# Altium PCB flyback.PcbDoc
Units mm, origin at the board's own origin, x right, y up, seen from the top; angles counter-clockwise.
Board outline 113.6 x 46 mm, 2 copper layers (Top Layer, Bottom Layer), stack 1.57 mm thick; 41 components, 13 nets, 92 pads, 23 vias.
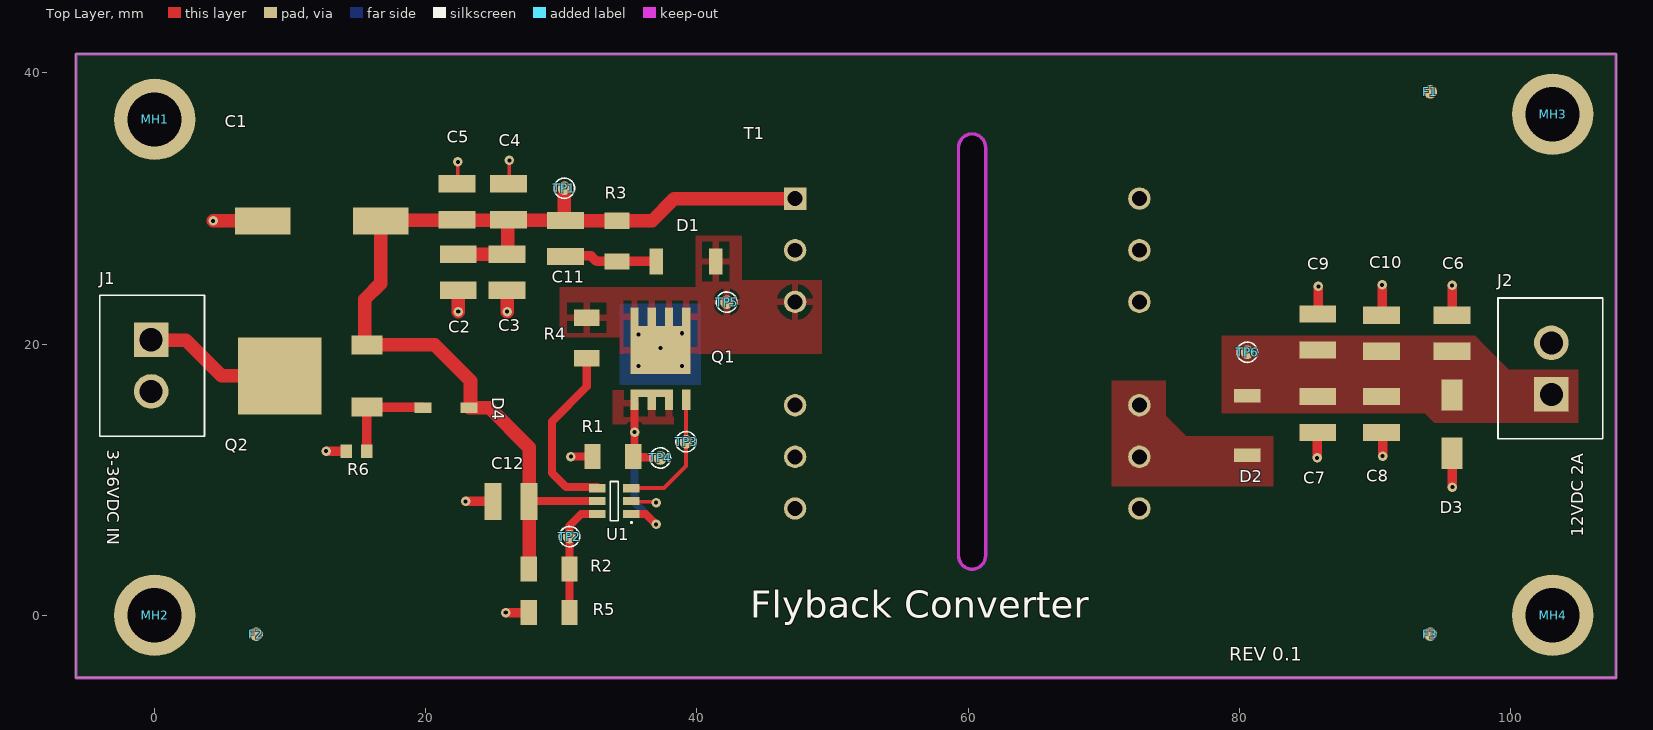
[diagram p0: Top Layer view]
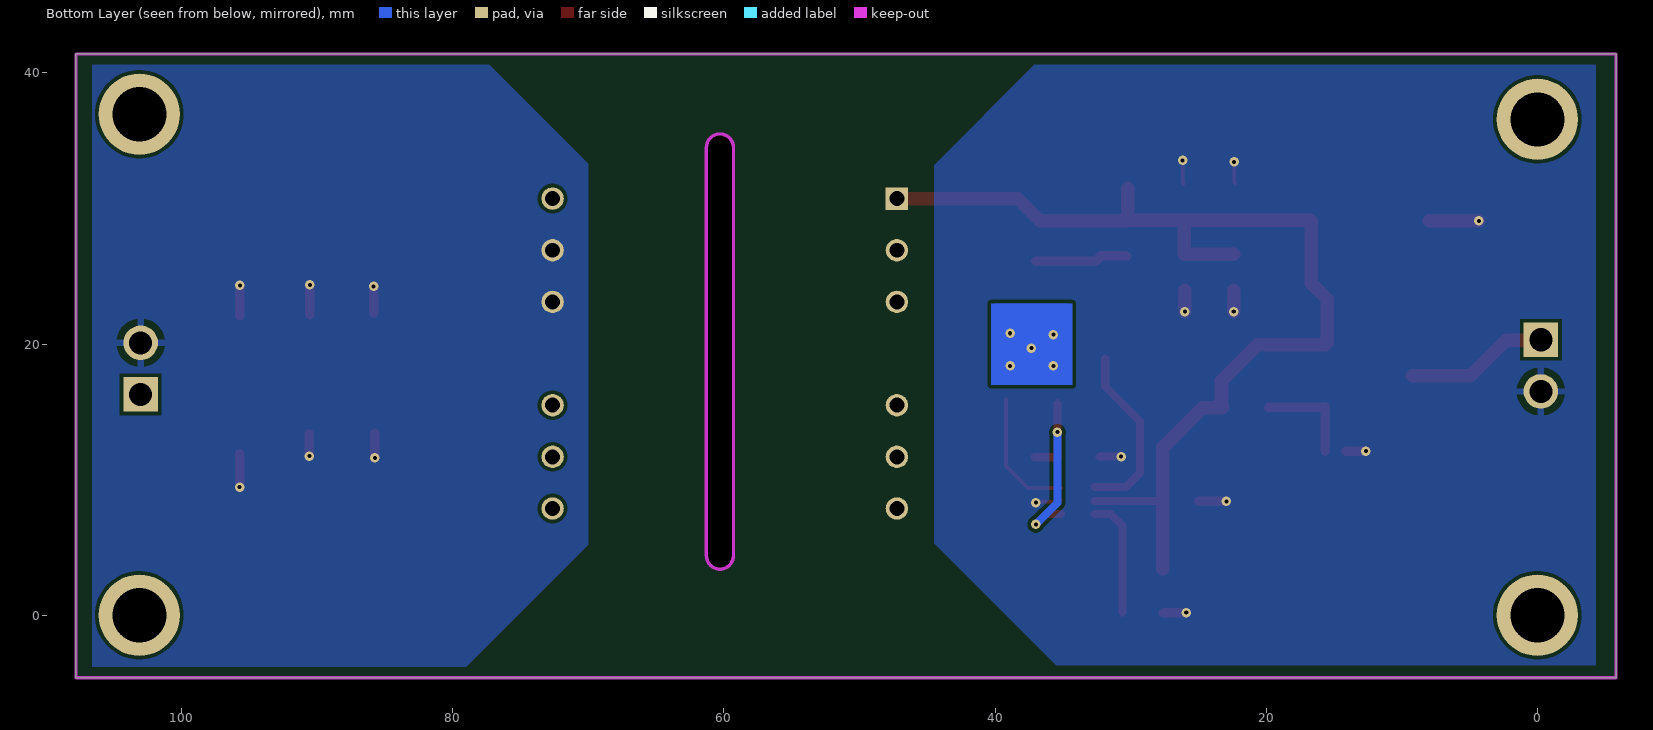
[diagram p1: Bottom Layer view, seen from below]
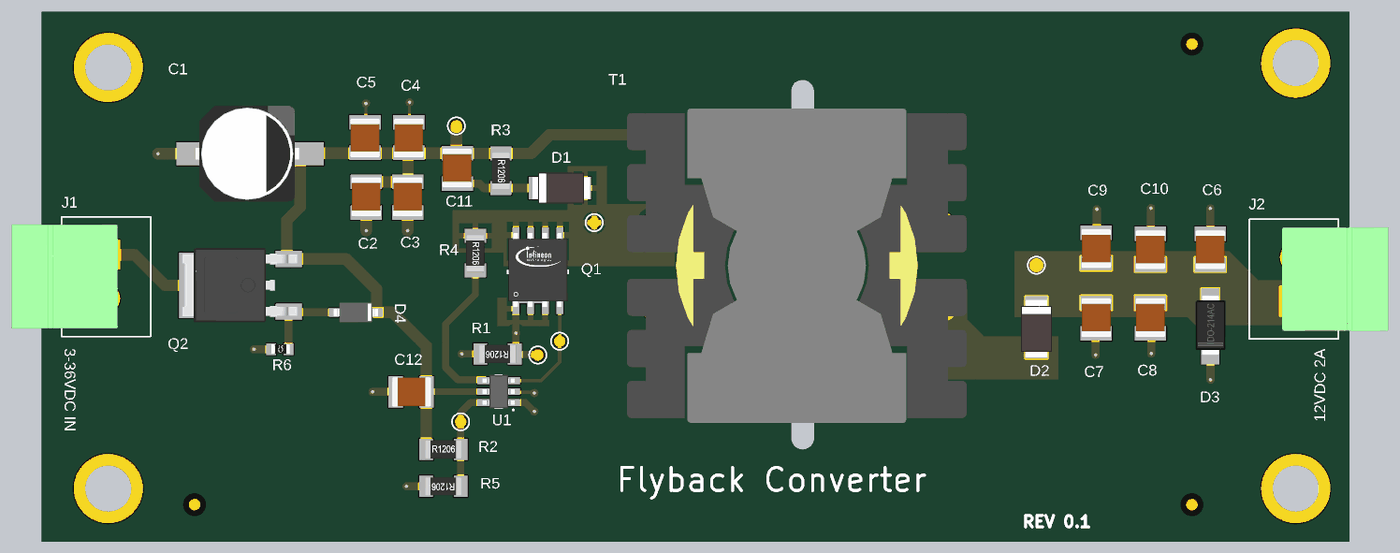
[diagram p2: 3D render of the assembled board from above, using the file's embedded part models]

## Layer stack, top to bottom
Top Solder: solder mask 0.0102, Solder Resist, Dk 3.5
Top Layer: signal copper 0.0356
Dielectric 1: core 1.4986, Core-043, Dk 4.3
Bottom Layer: signal copper 0.0356
Bottom Solder: solder mask 0.0102, Solder Resist, Dk 3.5

## Board outline
-5.8,-4.6 -5.8,41.4 107.8,41.4 107.8,-4.6
cut-out: 59.3,4.4 ccw(c60.3,4.4) 61.3,4.4 61.3,34.5 ccw(c60.3,34.5) 59.3,34.5

## Design rules (kind name [scope] priority, off if disabled: settings)
Clearance [All] p1: gap=0.254 ignorepadtopadclearanceinfootprint=TRUE
HoleSize [All] p1: absolutevalues=TRUE maxlimit=10 minlimit=0.3 maxpercent=80.000 minpercent=20.000
MinimumSolderMaskSliver [All] p1: minsoldermaskwidth=0.127
PolygonConnect PolygonConnect_D2_1 [InNet('NetD2_1')] p1: connectstyle=Direct reliefconductorwidth=0.5 reliefentries=4 polygonreliefangle="90 Angle" airgapwidth=0.5
PolygonConnect PolygonConnect_C6_1 [InNet('NetC6_1')] p2: connectstyle=Direct reliefconductorwidth=0.254 reliefentries=4 polygonreliefangle="90 Angle" airgapwidth=0.254
PolygonConnect PolygonConnect_MOS2 [InNet('NetQ1_1,2,3,10')] p3: connectstyle=Relief reliefconductorwidth=0.5 reliefentries=4 polygonreliefangle="90 Angle" airgapwidth=0.5
PolygonConnect PolygonConnect_MOS [InNet('NetD1_1')And OnTopLayer] p4: connectstyle=Relief reliefconductorwidth=0.5 reliefentries=4 polygonreliefangle="90 Angle" airgapwidth=0.5
PolygonConnect PolygonConnect_MOS_thermal [(InNet('NetD1_1') AND InNamedPolygon('NETD1_1_L02_P005'))] p5: connectstyle=Direct reliefconductorwidth=0.5 reliefentries=4 polygonreliefangle="90 Angle" airgapwidth=0.5
PolygonConnect [All] p6: thpad.connectstyle=Relief thpad.reliefconductorwidth=0.5 thpad.reliefentries=4 thpad.polygonreliefangle="90 Angle" thpad.airgapwidth=0.5 smdpad.connectstyle=Relief smdpad.reliefconductorwidth=0.254 smdpad.reliefentries=4 smdpad.polygonreliefangle="90 Angle" smdpad.airgapwidth=0.254 via.connectstyle=Direct via.reliefconductorwidth=0.254 via.reliefentries=4 via.polygonreliefangle="90 Angle" via.airgapwidth=0.254
RoutingVias [All] p1: holewidth=0.711 width=1.27 viastyle="Through Hole" minholewidth=0.711 minwidth=1.27 maxholewidth=0.711 maxwidth=1.27 useviatemplates=TRUE viatemplateguid#1={F599AC71-F662-4EF0-829F-EA753E07D89C} viatemplatename#1=v70h30m80
SilkToSolderMaskClearance [IsPad] p1: minsilkscreentomaskgap=0.127 clearancetoexposedcopper=TRUE
SolderMaskExpansion [All] p1: expansion=0.102 istentingtop=FALSE
Width [All] p1: maxlimit=1.27 minlimit=0.254 preferedwidth=0.6
27 further rules are at their usual default settings.

## Components (designator, comment, footprint, x,y, rotation, side; value= is the part's Value field where it differs from the comment)
C1 "50VDC" ECAP-EEH-ZE1H101P 12.319,29.083 r180 top value=100uF
C2 "50VDC" CAP-1210 22.3,30.5 r90 top value=10uF
C3 "50VDC" CAP-1210 26.1,30.5 r90 top value=10uF
C4 "50VDC" CAP-1210 26,25.3 r270 top value=10uF
C5 "50VDC" CAP-1210 22.4,25.3 r270 top value=10uF
C6 "25VDC" CAP-1210 95.7,20.8 r90 top value=0.1uF
C7 "25VDC" CAP-1210 85.8,14.8 r270 top value=22uF
C8 "25VDC" CAP-1210 90.5,14.8 r270 top value=22uF
C9 "25VDC" CAP-1210 85.8,20.9 r90 top value=22uF
C10 "25VDC" CAP-1210 90.5,20.8 r90 top value=22uF
C11 "50VDC" CAP-1210 30.3,27.8 r270 top
C12 "50VDC" CAP-1210 26.3,8.4 r180 top
D1 "Schottky Diode" SOD-128-2 39.2,26.1 r180 top
D2 "Schottky Diode" SOD-128-2 80.6,14 r90 top
D3 "Zener Diode" DIOM5226X220N 95.7,14.1 r90 top
D4 "Zener Diode" SOD-123-2 21.5,15.3 r0 top
F1 "Fiducial_3" FIDUCIAL 94.107,38.608 r0 top
F2 "Fiducial_3" FIDUCIAL 7.493,-1.397 r0 top
F3 "Fiducial_3" FIDUCIAL 94.107,-1.397 r0 top
J1 "PT Block 2P" TBP02R1-381-02BE -0.254,20.32 r270 top locked
J2 "PT Block 2P" TBP02R1-381-02BE 103.028,16.287 r90 top locked
MH1 "MH" MH#1 0,40.386 r0 top
MH2 "MH" MH#2 0,0 r0 top
MH3 "MH" MH#2 103.124,36.957 r0 top
MH4 "MH" MH#2 103.124,0 r0 top
Q1 "MOSFET N" TDSON-8 37.307,18.82 r0 top
Q2 "" TO-252-3 9.23,17.653 r90 top
R1 "Sense Resistors" R1206 33.8,11.7 r180 top value=6m
R2 "Resistor" R1206 29.1,3.4 r0 top value=100k
R3 "Resistor" R1206 34.1,27.6 r270 top value=100k
R4 "Resistor" R1206 31.877,20.447 r270 top value=118k
R5 "Resistor" R1206 29.1,0.2 r180 top value=28k
R6 "Resistor" R0603 14.9,12.1 r180 top value=1.4k
T1 "Transformer" 11328-T078 47.244,30.734 r0 top
TP1 "TP" TP 30.226,31.496 r0 top
TP2 "TP" TP 30.6,5.8 r90 top
TP3 "TP" TP 39.2,12.8 r90 top
TP4 "TP" TP 37.3,11.6 r90 top
TP5 "TP" TP 42.2,23.1 r90 top
TP6 "TP" TP 80.6,19.4 r90 top
U1 "LT8306RS6#WTRMPBF" SOT-23-6 33.909,8.421 r180 top

## Footprints (in the part's own frame and the unit in brackets; to place one, negate y for a bottom-side part, rotate by r counter-clockwise, add the part's x,y. Pads: shape width x height; smd on the part's side, far side on the other; paste and mask are expansions set on the pad)
11328-T078 [mm]
  rect 1.65x1.65 / inner round 1.524 / far side rect 1.65x1.65 hole 1.1: 1(0,0)
  round 1.65 hole 1.1: 2(0,-3.81) 3(0,-7.62) 4(0,-15.24) 5(0,-19.05) 6(0,-22.86) 7(25.4,-22.86) 8(25.4,-19.05) 9(25.4,-15.24) 10(25.4,-7.62) 11(25.4,-3.81) 12(25.4,0)
  body extent -2.2,-25.01 27.3,2.29, height 5.36
CAP-1210 [mm]
  rect 1.26x2.72 smd: 1(-1.33,0) 2(1.33,0)
  body extent -1.75,-1.3 1.65,1.3, height 1.5
DIOM5226X220N [mm]
  rect 2.3x1.55 smd: 1(-2.15,0) 2(2.15,0)
  body extent -2.51,-1.33 2.69,1.27, height 2.29
ECAP-EEH-ZE1H101P [mm]
  rect 4.1x2 smd: 1(-4.35,0) 2(4.35,0)
  body extent -4.25,-4.15 4.75,4.15, height 6.2
FIDUCIAL [mm] "1MM FIDUCAL MARKER"
  round 1 smd paste-1 mask+0.5: F1(0,0)
  Top Layer pour cut-out: -1.5,0 -1.386,-0.574 -1.061,-1.061 -0.574,-1.386 0,-1.5 0,-1.5 0.574,-1.386 1.061,-1.061 1.386,-0.574 1.5,0 1.5,0 1.386,0.574 1.061,1.061 0.574,1.386 0,1.5 0,1.5 -0.574,1.386 -1.061,1.061 -1.386,0.574 -1.5,0
MH#1 [mm]
  round 6 hole 4 mask+0.1: MH(0,-3.81)
MH#2 [mm]
  round 6 hole 4 mask+0.1: MH(0,0)
R0603 [mm]
  rect 0.85x1 smd: 1(-0.75,0) 2(0.75,0)
  body extent -0.87,-0.42 0.73,0.38, height 0.47
R1206 [mm]
  rect 1.2x1.85 smd: 1(-1.5,0) 2(1.5,0)
  body extent -1.6,-0.8 1.6,0.8, height 0.85
SOD-123-2 [mm]
  rect 1.25x0.75 smd: 1(-1.7,0) 2(1.7,0)
  body extent -1.92,-0.85 1.92,0.85, height 1.36
SOD-128-2 [mm]
  rect 1x1.93 smd: 1(-2.2,0) 2(2.2,0)
  body extent -2.63,-1.35 2.37,1.35, height 1.1
SOT-23-6 [mm]
  rect 1.2x0.6 smd: 1(-1.25,0.95) 2(-1.25,0) 3(-1.25,-0.95) 4(1.25,-0.95) 5(1.25,0) 6(1.25,0.95)
  silkscreen extent -1.31,-1.45 0.3,1.64, body extent -1.4,-1.45 1.4,1.45, height 1.45
TBP02R1-381-02BE [mm]
  rect 2.55x2.55 hole 1.7: 1(0,0)
  round 2.55 hole 1.7: 2(3.81,0)
  silkscreen extent -3.28,-3.8 7.11,3.94, body extent -2.6,-8.13 6.41,1.07, height 7.95
TDSON-8 [mm]
  rect 0.6x0.935 smd: 1(-1.905,-3.199) 2(-0.635,-3.199) 3(0.635,-3.199)
  rect 0.6x1.5 smd: 4(1.905,-2.916)
  rect 0.6x1.35 smd: 5(1.905,3.199) 6(0.635,3.199) 7(-0.635,3.199) 8(-1.905,3.199)
  rect 4.41x3.545 smd: 9(0,0.751)
  rect 3.14x0.565 smd: 10(-0.635,-2.449)
  body extent -2.7,-3.05 2.71,3.39, height 1
TO-252-3 [mil]
  rect 55x90 smd: 1(-90,-253.35) 3(90,-253.35)
  rect 224.02x243.31 smd: 2(0,0)
  body extent -127,-283 129,110, height 93
TP [mm]
  round 1 smd paste-2 mask+0.1: 1(0,0)
  silkscreen extent -0.75,-0.75 0.75,0.75

## Part data
C1: library part CAP_Electrolytic
C2 C3 C4 C5 C6 C7 C8 C9 C10 C11 C12: library part CAP_Ceramic
MH1 MH2 MH3 MH4: "Mounting Hole"
Q2: library part "MOSFET P"
R1: "Current Sense Resistors - SMD 0.006 ohm 1% 1.5W2"
TP1 TP2 TP3 TP4 TP5 TP6: "Test Point"
D1 D2: ComponentLink1Description="Manufacturer Link", ComponentLink1URL=http://www.infineon.com/, ComponentLink2Description=Datasheet, ComponentLink2URL=http://www.infineon.com/upload/Document/cmc_upload/documents/009/382/bas40_bas140series_1.pdf

## Via types
v1: diameter 0.7, hole 0.3, Top Layer to Bottom Layer, tented both sides, 18 vias
v2: diameter 0.7, hole 0.3, Top Layer to Bottom Layer, 5 vias

## Nets (pads, with @x,y where several pads share a name; then routed paths per layer and width w, separated by ;. In a path a pad name is that pad's centre, name@x,y a point inside that pad or via, vN(x,y) a via of type N, cw(c..) or ccw(c..) an arc to the next point about the centre after c; other vN are vias at no path point)
GND: C1.2 C2.2 C3.2 C4.2 C5.2 C12.2 J1.2 R1.2 R5.2 R6.2 U1.2 | length 18.9
  Top Layer w0.254: C2.2 22.375,31.905 v1(22.375,33.447) ; C3.2 26.165,31.895 v1(26.165,33.547) ; U1.2@35.163,8.505 35.308,8.36 36.94,8.36 v1(37,8.3)
  Top Layer w0.6: v1(30.7,11.7) R1.2
  Top Layer w0.7: v1(12.649,12.1) R6.2 ; v1(22.947,8.4) C12.2 ; v1(25.9,0.2) R5.2
  Top Layer w1: v1(4.317,29.083) C1.2 ; v1(22.4,22.4) C5.2 ; v1(26,22.4) C4.2
GND2: C6.2 C7.2 C8.2 C9.2 C10.2 D3.1 J2.2 T1.10 T1.11 | length 12.3
  Top Layer w0.7: v1(85.748,11.604) C7.2@85.748,13.418 ; C9.2@85.848,22.278 v1(85.848,24.262) ; C10.2@90.549,22.179 v1(90.549,24.362) ; v1(90.576,11.731) C8.2@90.576,13.394 ; C6.2@95.704,22.108 v1(95.704,24.336) ; v1(95.723,9.455) D3.1@95.723,11.927
NetC6_1: C6.1 C7.1 C8.1 C9.1 C10.1 D2.2 D3.2 J2.1 TP6.1
NetC11_2: C11.2 D1.2 R3.2 | length 6.9
  Top Layer w0.7: C11.2 30.33,26.5 32.2,26.5 32.6,26.1 R3.2 D1.2
NetD1_1: D1.1 Q1.5 Q1.6 Q1.7 Q1.8 Q1.9 R4.1 T1.3 TP5.1
  other v2: 35.7,18.4 38.9,18.4 37.327,19.699 35.7,20.7 38.9,20.8
NetD2_1: D2.1 T1.8 T1.9
NetD4_1: D4.1 Q2.1 R6.1 | length 7.4
  Top Layer w0.7: R6.1 15.65,15.352 Q2.1 15.707,15.325 19.775,15.325 D4.1
NetJ1_1: J1.1 Q2.2 | length 10.6
  Top Layer w1: J1.1 -0.234,20.3 2.3,20.3 4.947,17.653 Q2.2
NetQ1_1,2,3,10: Q1.1 Q1.2 Q1.3 Q1.10 R1.1 TP4.1 U1.1 | length 15.4
  Top Layer w0.6: U1.1 36.229,7.471 v1(37,6.7) ; v1(35.4,13.5) 35.4,11.7 35.35,11.65 TP4.1@37.1,11.65 ; v1@35.402,13.5 Q1.1
  Bottom Layer w0.6: v1(35.4,13.5) 35.4,8.3 v1(37,6.7)
NetQ1_4: Q1.4 TP3.1 U1.3 | length 9.6
  Top Layer w0.3: U1.3 37.571,9.371 39.2,11 TP3.1 39.206,12.806 39.206,15.898 Q1.4
NetR2_2: R2.2 R5.1 TP2.1 U1.6 | length 8.8
  Top Layer w0.6: TP2.1 30.6,6.597 31.474,7.471 U1.6 ; R5.1 R2.2 TP2.1
NetR4_2: R4.2 U1.4 | length 13.3
  Top Layer w0.6: R4.2 31.877,16.877 29.3,14.3 29.3,10.5 30.341,9.459 U1.4@32.659,9.459
Vin: C1.1 C2.1 C3.1 C4.1 C5.1 C11.1 C12.1 D4.2 Q2.3 R2.1 R3.1 T1.1 TP1.1 U1.5 | length 79.5
  Top Layer w0.6: C12.1@27.834,8.421 U1.5
  Top Layer w1: C5.1 C4.1 ; D4.2 D4.2@23.3,15.3 ; C4.1@26.035,26.63 C3.1@26.035,29.127 ; C3.1@26.1,29.13 C11.1 ; C3.1 26.056,29.127 C3.1@26.035,29.127 ; R2.1@27.619,3.419 27.619,12.381 24.7,15.3 D4.2@23.3,15.3 ; C11.1@30.226,29.204 TP1.1 ; C11.1@30.31,29.1 R3.1 36.7,29.1 38.334,30.734 T1.1 ; D4.2@23.3,15.3 23.3,17.3 20.661,19.939 Q2.3 15.5,20.104 15.5,23.3 16.669,24.469 C1.1 16.713,29.127 C3.1@26.035,29.127
pads on no net: F1.F1 F2.F1 F3.F1 MH1.MH MH2.MH MH3.MH MH4.MH T1.2 T1.4 T1.5 T1.6 T1.7 T1.12

## Polygon pours and split planes (outlines as drawn)
GND2 on Bottom Layer "GND2_L02_P000" (solid, remove dead copper, pour order 0): 70,5.2 79,-3.8 106.6,-3.8 106.6,40.6 77.3,40.6 70,33.3
GND on Bottom Layer "GND_L02_P001" (solid, remove dead copper, pour order 1): -4.3,40.6 37.1,40.6 44.5,33.2 44.5,5.3 35.5,-3.7 -4.3,-3.7
NetD1_1 on Bottom Layer "NETD1_1_L02_P006" (solid, remove dead copper, pour order 6): 34.6,23 40,23 40,17.4 34.6,17.4
NetD2_1 on Top Layer "NETD2_1_L01_P008" (solid, remove dead copper, pour order 8): 82.5,13.2 76.1,13.2 74.6,14.7 74.6,17.3 70.6,17.3 70.6,9.5 70.7,9.5 82.5,9.5
NetC6_1 on Top Layer "NETC6_1_L01_P007" (solid, remove dead copper, pour order 7): 78.7,14.9 93.7,14.9 94.4,14.2 105,14.2 105,15.1 105,18.1 99.9,18.1 98,20 97.4,20.6 78.7,20.6 78.7,19.5
NetD1_1 on Top Layer "NETD1_1_L01_P004" (solid, remove dead copper, pour order 4): 29.9,24.2 39.9,24.2 39.9,28 43.3,28 43.3,24.7 49.2,24.7 49.2,19.3 43.3,19.3 34.3,19.3 34.3,20.5 29.9,20.5
NetQ1_1,2,3,10 on Top Layer "NETQ1_1,2,3,10_L01_P003" (solid, remove dead copper, pour order 3): 33.8,16.6 38.3,16.6 38.3,14.1 33.8,14.1

## Keep-outs
Keep-Out Layer:
  lines w0.254: -5.8,-4.6 107.8,-4.6 107.8,41.4 -5.8,41.4 -5.8,-4.6 ; 59.3,4.4 ccw(c60.3,4.4) 61.3,4.4 61.3,34.5 ccw(c60.3,34.5) 59.3,34.5 59.3,4.4

## Other copper
Bottom Layer:
  rectangle net NetD1_1: 34.3,17 40.3,23

## Silkscreen, mask and mechanical layers (free items; w line width, h text height)
Top Overlay:
  text "3-36VDC IN" at -3.783,12.2 h1.52 r270
  text "12VDC 2A" at 105.683,5.8 h1.52 r90
  text "Flyback Converter" at 43.954,-0.18 h2
  text "REV 0.1" at 79.254,-3.346 h1